# EAGLE board RTC-bob (EAGLE 5.10)
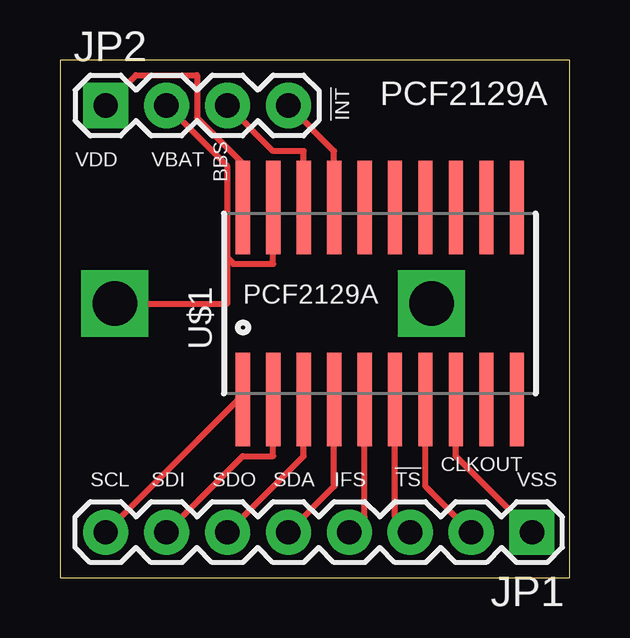
[diagram p0: board, top side]
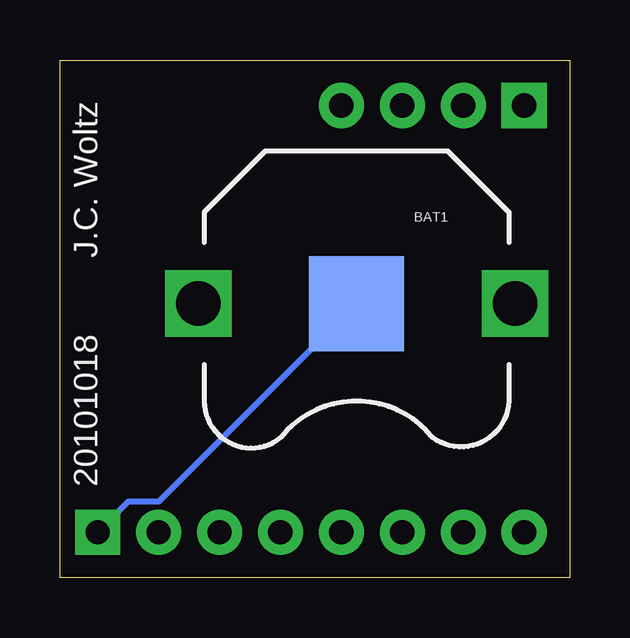
[diagram p1: board, bottom side, seen from below]

Size 21.26 x 21.58 mm. Coordinates in mm from the lower left corner, seen from the top.
Outline: 0,0 21.26,0 21.26,21.58 0,21.58 0,0
Copper layers (1*16): Top 0.0356mm / dielectric 1.5011mm / Bottom 0.0356mm
Design rules "LaenPCBOrder-JCModified": minimum track width 10mil, minimum drill 13mil, track to track 10mil, track to pad 6mil, pad to pad 6mil, via to via 6mil, smd to smd 6mil, copper to edge 15mil, drill to drill 6mil, minimum pad ring 12mil, minimum via ring 7mil, stop-mask expansion 4mil, vias tented up to drill 25mil, thermal gap 10mil

## Footprints (pad centres in the part's own frame; a part is rotated, then mirrored left to right if it is on the bottom)
BATTCON_12MM_PTH = smd 3.962 x 3.962: GND 0,0 | drill 1.854 square: VCC@1 -6.604,0; VCC@2 6.604,0
1X08 = drill 1.016 pad 1.88 square: 1 0,0 | drill 1.016 pad 1.88 round: 2 2.54,0; 3 5.08,0; 4 7.62,0; 5 10.16,0; 6 12.7,0; 7 15.24,0; 8 17.78,0
1X04 = drill 1.016 pad 1.88 square: 1 0,0 | drill 1.016 pad 1.88 round: 2 2.54,0; 3 5.08,0; 4 7.62,0
SO20W = smd 0.6 x 3.9: P$1 -5.715,-4; P$2 -4.445,-4; P$3 -3.175,-4; P$4 -1.905,-4; P$5 -0.635,-4; P$6 0.635,-4; P$7 1.905,-4; P$8 3.175,-4; P$9 4.445,-4; P$10 5.715,-4; P$11 5.715,4; P$12 4.445,4; P$13 3.175,4; P$14 1.905,4; P$15 0.635,4; P$16 -0.635,4; P$17 -1.905,4; P$18 -3.175,4; P$19 -4.445,4; P$20 -5.715,4

## Placement (x,y rotation side)
BAT1  [BATTCON_12MM_PTH]  8.89,11.43 180 bottom
JP1  [1X08]  19.68,1.91 180 top
JP2  [1X04]  1.91,19.68 0 top
U$1  PCF2129ASO20  [SO20W]  13.34,11.43 0 top

## Library data of the parts
BAT1 JP1 JP2 = SparkFun
U$1 = 0_jc-custom

## Nets
N$1: JP2.1 U$1.P$20
N$3: JP2.3 U$1.P$18
N$4: JP2.4 U$1.P$17
N$6: JP1.2 U$1.P$7
N$7: JP1.4 U$1.P$5
N$8: JP1.5 U$1.P$4
N$9: JP1.6 U$1.P$3
N$10: JP1.7 U$1.P$2
N$11: JP1.8 U$1.P$1
N$12: JP1.3 U$1.P$6
VBAT: BAT1.VCC@1 JP2.2 U$1.P$19
VSS: BAT1.GND JP1.1 U$1.P$8

## Tracks (layer width: path | path; a pad name or v marks a point on that pad's centre or on a via)
N$1
  Top 0.254: JP2.1 3.17,20.95 5.71,20.95 5.71,19.18 7.62,17.27 U$1.P$20
N$3
  Top 0.254: JP2.3 8.89,17.78 10.16,17.78 U$1.P$18
N$4
  Top 0.254: JP2.4 11.43,17.78 U$1.P$17
N$6
  Top 0.254: JP1.2 15.24,3.81 U$1.P$7
N$7
  Top 0.254: JP1.4 12.7,2.54 U$1.P$5
N$8
  Top 0.254: JP1.5 11.43,3.81 U$1.P$4
N$9
  Top 0.254: JP1.6 10.16,5.08 U$1.P$3
N$10
  Top 0.254: JP1.7 7.62,5.08 8.89,5.08 U$1.P$2
N$11
  Top 0.254: JP1.8 7.37,7.37 7.62,7.37 U$1.P$1
N$12
  Top 0.254: JP1.3 13.97,2.54 U$1.P$6
VBAT
  Top 0.254: JP2.2 6.99,17.14 6.99,13.34 7.05,13.27 | 7.05,13.27 7.24,13.08 8.89,13.08 U$1.P$19 | BAT1.VCC@1 6.99,11.43 6.99,13.21 7.05,13.27
VSS
  Top 0.254: JP1.1 16.51,5.08 U$1.P$8
  Bottom 0.254: BAT1.GND 17.14,3.17 18.41,3.17 JP1.1

## Text on the board
tPlace: !INT | PCF2129A | VDD | VBAT | BBS | PCF2129A | CLKOUT | SCL | SDI | SDO | SDA | IFS | !TS | VSS
bPlace: J.C. Woltz | 20101018